# EAGLE board naswietlarka (EAGLE 6.5.0)
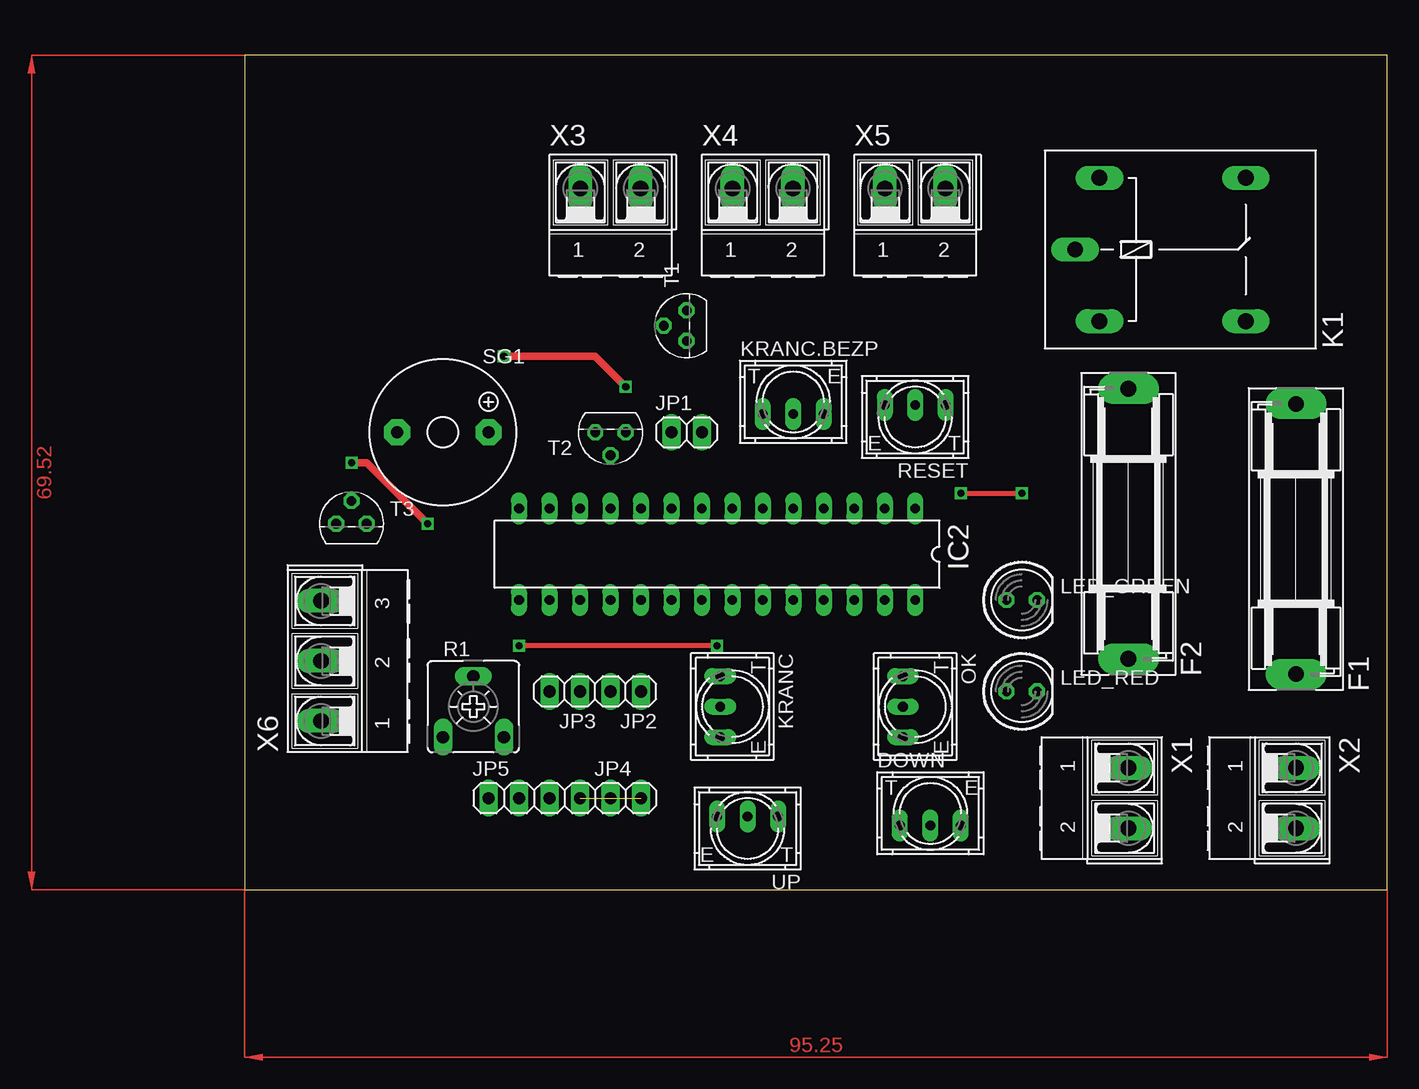
[diagram p0: board, top side]
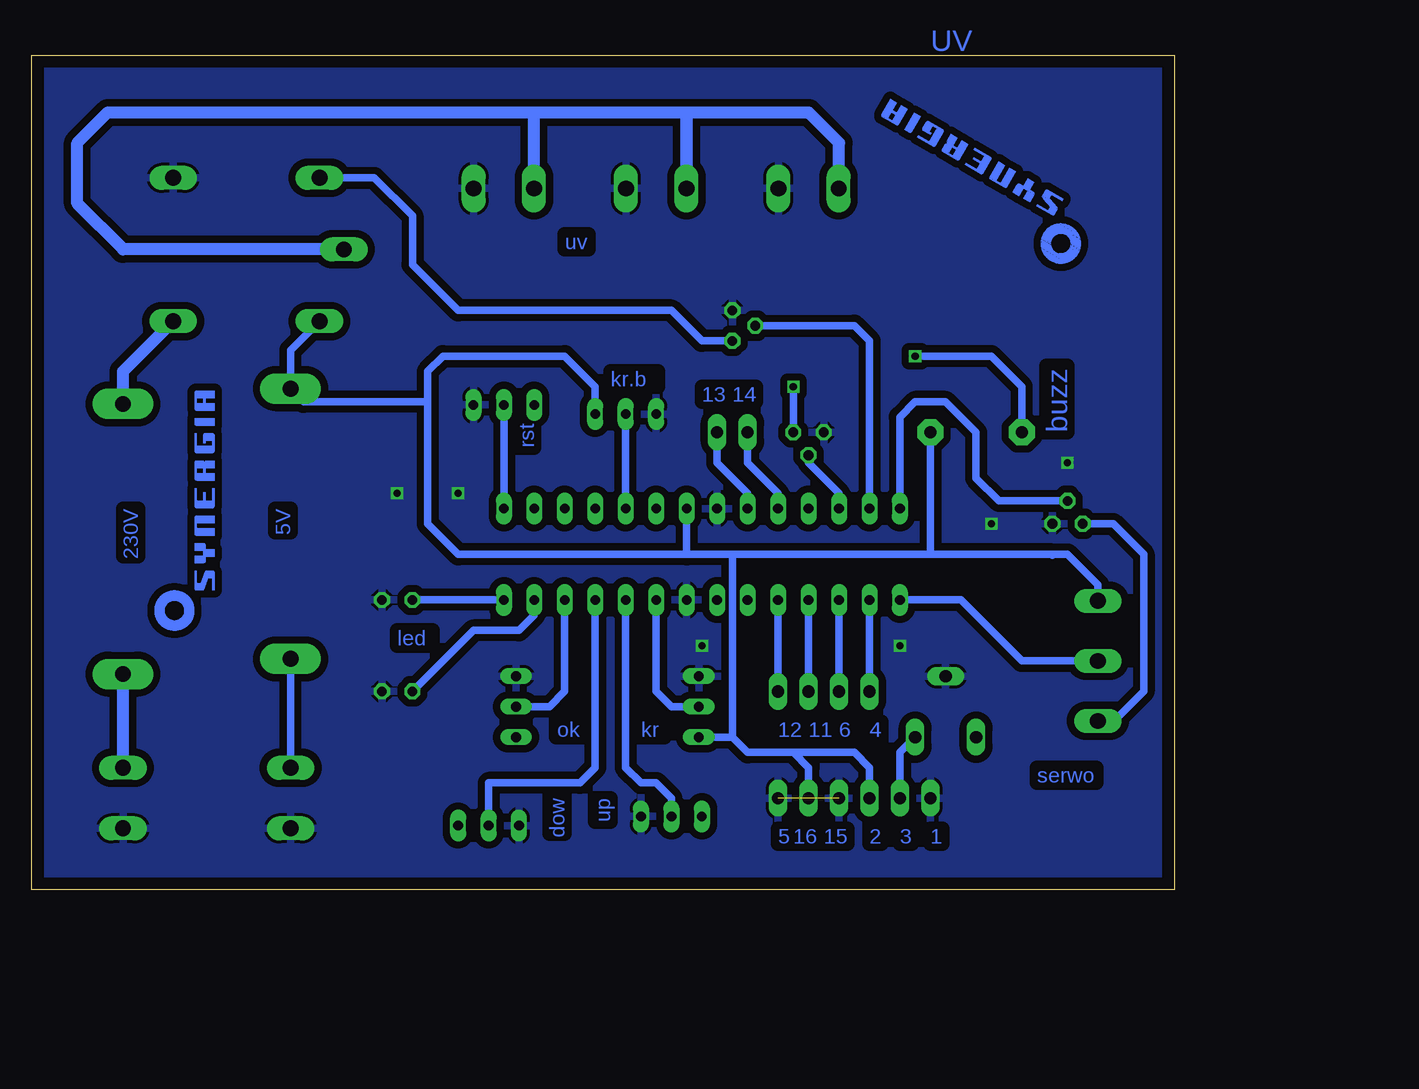
[diagram p1: board, bottom side, seen from below]

Size 95.23 x 69.52 mm. Coordinates in mm from the lower left corner, seen from the top.
Outline: 0,0 95.23,0 95.23,69.52 0,69.52 0,0
Copper layers (1*16): Top 0.035mm / dielectric 1.5mm / Bottom 0.035mm
Design rules "default": minimum track width 10mil, minimum drill 24mil, track to track 8mil, track to pad 8mil, pad to pad 8mil, via to via 8mil, smd to smd 8mil, copper to edge 40mil, drill to drill 8mil, minimum pad ring 10mil, minimum via ring 8mil, stop-mask expansion 4mil, vias tented up to drill 0mil, thermal gap 10mil

## Footprints (pad centres in the part's own frame; a part is rotated, then mirrored left to right if it is on the bottom)
TUXGR_16X2_R2 = drill 1 pad 1.676: 1 -32,15.5; 2 -29.46,15.5; 3 -26.92,15.5; 4 -24.38,15.5; 5 -21.84,15.5; 6 -19.3,15.5; 7 -16.76,15.5; 8 -14.22,15.5; 9 -11.68,15.5; 10 -9.14,15.5; 11 -6.6,15.5; 12 -4.06,15.5; 13 -1.52,15.5; 14 1.02,15.5; 15 3.56,15.5; 16 6.1,15.5 | hole 2.5: -37.5,-15.5; 37.5,-15.5; -37.5,15.5; 37.5,15.5
9077-1 = drill 0.813 long: 1 -2.54,-1.016; 2 0,-1.016; 3 2.54,-1.016
SH22,5 = drill 1.321 pad 2.54 long: 1 -11.252,0; 2 11.252,0
DIL28-3 = drill 0.813 long: 1 -16.51,-3.81; 2 -13.97,-3.81; 3 -11.43,-3.81; 4 -8.89,-3.81; 5 -6.35,-3.81; 6 -3.81,-3.81; 7 -1.27,-3.81; 8 1.27,-3.81; 9 3.81,-3.81; 10 6.35,-3.81; 11 8.89,-3.81; 12 11.43,-3.81; 13 13.97,-3.81; 14 16.51,-3.81; 15 16.51,3.81; 16 13.97,3.81; 17 11.43,3.81; 18 8.89,3.81; 19 6.35,3.81; 20 3.81,3.81; 21 1.27,3.81; 22 -1.27,3.81; 23 -3.81,3.81; 24 -6.35,3.81; 25 -8.89,3.81; 26 -11.43,3.81; 27 -13.97,3.81; 28 -16.51,3.81
1X02 = drill 1.016 long: 1 -1.27,0; 2 1.27,0
1X04 = drill 1.016 long: 1 -3.81,0; 2 -1.27,0; 3 1.27,0; 4 3.81,0
G5LE = drill 1.321 long: 1 -7.493,-5.969; 2 -7.493,5.969; O 4.699,5.969; P -9.525,0; S 4.699,-5.969
LED5MM = drill 0.813 octagon: A -1.27,0; K 1.27,0
CA6V = drill 1.016 long: A -2.54,-2.54; E 2.54,-2.54; S 0,2.54
F/TMB = drill 1.016 pad 2.159 octagon: + 3.81,0; - -3.81,0
TO92 = drill 0.813 octagon: 1 1.27,0; 2 0,1.905; 3 -1.27,0
AK500/2-H = drill 1.321 long: 1 -2.515,0; 2 2.515,0
AK500/3-H = drill 1.321 long: 1 -5.004,0; 2 0,0; 3 5.004,0

## Placement (x,y rotation side)
DIS1  TUXGR_16X2_R2  [TUXGR_16X2_R2]  40.64,-43.18 0 top  (outside the outline)
DOWN  9077-1  [9077-1]  57.15,6.35 0 top
F1  [SH22,5]  87.63,29.21 90 top
F2  [SH22,5]  73.66,30.48 90 top
IC2  MEGA8-P  [DIL28-3]  39.37,27.94 180 top
JP1  [1X02]  36.83,38.1 0 top
JP2  [1X02]  31.75,16.51 180 top
JP3  [1X02]  26.67,16.51 180 top
JP4  [1X02]  31.75,7.62 0 top
JP5  [1X04]  24.13,7.62 0 top
K1  G5L  [G5LE]  78.74,53.34 0 top
KRANC  9077-1  [9077-1]  40.64,15.24 270 top
KRANC.BEZP  9077-1  [9077-1]  45.72,40.64 0 top
LED_GREEN  [LED5MM]  64.77,24.13 0 top
LED_RED  [LED5MM]  64.77,16.51 0 top
OK  9077-1  [9077-1]  55.88,15.24 270 top
R1  [CA6V]  19.05,15.24 0 top
RESET  9077-1  [9077-1]  55.88,39.37 180 top
SG1  F/TMB  [F/TMB]  16.51,38.1 0 top
T1  BC547  [TO92]  36.83,46.99 90 top
T2  BC547  [TO92]  30.48,38.1 180 top
T3  BC547  [TO92]  8.89,30.48 0 top
U$1  [SYNERGIA_20MM]  80.01,21.59 90 bottom
U$2  [SYNERGIA_20MM]  6.35,55.88 150 bottom
UP  9077-1  [9077-1]  41.91,5.08 180 top
X1  [AK500/2-H]  73.66,7.62 270 top
X2  [AK500/2-H]  87.63,7.62 270 top
X3  [AK500/2-H]  30.48,58.42 0 top
X4  [AK500/2-H]  43.18,58.42 0 top
X5  [AK500/2-H]  55.88,58.42 0 top
X6  [AK500/3-H]  6.35,19.05 90 top

## Library data of the parts
DIS1 = display-lcd; OC_FARNELL: unknown; OC_NEWARK: unknown
DOWN KRANC KRANC.BEZP OK RESET UP = switch-misc
F1 F2 = fuse; MF: SCHURTER; MPN: 0031.8201; OC_FARNELL: 1162740; OC_NEWARK: 96F8317
IC2 = atmel; OC_FARNELL: unknown; OC_NEWARK: unknown
JP1-JP5 = pinhead
K1 = relay; OC_FARNELL: unknown; OC_NEWARK: unknown
LED_GREEN LED_RED = led
R1 = pot
SG1 = buzzer; OC_FARNELL: unknown; OC_NEWARK: unknown
T1-T3 = transistor
U$1 U$2 = synergia_logo
X1-X6 = con-ptr500; OC_FARNELL: unknown; OC_NEWARK: unknown

## Nets
+5V: F2.2 IC2.7 JP4.1 JP5.3 K1.1 KRANC.3 KRANC.BEZP.3 SG1.+ X6.3
AVCC: IC2.20
BUZZER: IC2.12 T2.2
DOWN: DOWN.2 IC2.25
EN_PWM: IC2.14 T3.2
GND: DOWN.1 IC2.8 IC2.22 JP4.2 JP5.1 JP5.4 K1.O KRANC.1 KRANC.BEZP.1 LED_GREEN.K LED_RED.K OK.1 R1.S RESET.1 T1.1 T2.1 T3.1 UP.1 X1.2 X2.2 X3.2 X4.2 X5.2
KRANC: IC2.23 KRANC.2
KRANC.BEZP: IC2.5 KRANC.BEZP.2
LED_GREEN: IC2.28 LED_GREEN.A
LED_RED: IC2.27 LED_RED.A
N$1: JP5.2 R1.E
N$2: K1.2 T1.3
N$3: F1.1 X2.1
N$4: SG1.- T2.3
N$5: F2.1 X1.1
N$6: DIS1.1
N$7: DIS1.2
N$9: T3.3 X6.1
OK: IC2.26 OK.2
PB2: IC2.16 JP3.2
PB3: IC2.17 JP3.1
PB4: IC2.18 JP2.2
PB5: IC2.19 JP2.1
PB6: IC2.9 JP1.2
PB7: IC2.10 JP1.1
PWM: IC2.15 X6.2
RELAY: IC2.13 T1.2
RESET: IC2.1 RESET.2
UP: IC2.24 UP.2
UV: K1.P X3.1 X4.1 X5.1
VCC: F1.2 K1.S

## Tracks (layer width: path | path; a pad name or v marks a point on that pad's centre or on a via)
+5V
  Bottom 0.61: IC2.7 40.64,27.94 | 40.64,27.94 59.69,27.94 62.23,30.48 62.23,40.64 | 10.16,27.94 10.16,27.86 | 10.16,27.94 20.32,27.94 | 20.32,27.94 36.83,27.94 | 36.83,27.94 40.64,27.94 | JP5.3 25.4,10.16 26.67,11.43 31.75,11.43 | 31.75,11.43 35.56,11.43 36.83,12.7 | JP4.1 30.48,10.16 31.75,11.43 | K1.1 73.66,44.96 F2.2 72.57,40.64 62.23,40.64 | 62.23,40.64 62.23,43.18 60.96,44.45 50.8,44.45 48.26,41.91 KRANC.BEZP.3 | KRANC.3 36.83,12.7 | 36.83,12.7 36.83,27.94 | 10.16,27.94 8.89,27.94 6.35,25.4 X6.3 | SG1.+ 20.32,27.94
BUZZER
  Bottom 0.61: T2.2 30.48,35.56 27.94,33.02 IC2.12
DOWN
  Bottom 0.61: IC2.25 48.26,10.16 49.53,8.89 57.15,8.89 DOWN.2
EN_PWM
  Bottom 0.61: T3.2 14.61,32.39 16.51,34.29 16.51,38.1 19.05,40.64 21.59,40.64 22.86,39.37 IC2.14
GND  (via drill 0.6)  (1 unrouted)
  Top 0.406: v39.37,20.32 v22.86,20.32 | v59.69,33.02 v64.77,33.02
  Top 0.61: v8.89,35.56 10.16,35.56 v15.24,30.48
  pour Bottom (isolate 0.61): -8.89,74.93 101.6,76.2 101.6,-3.81 -7.62,-5.08
KRANC
  Bottom 0.61: IC2.23 43.18,16.51 41.91,15.24 KRANC.2
KRANC.BEZP
  Bottom 0.61: IC2.5 KRANC.BEZP.2
LED_GREEN
  Bottom 0.61: IC2.28 LED_GREEN.A
LED_RED
  Bottom 0.61: IC2.27 53.34,22.86 54.61,21.59 58.42,21.59 LED_RED.A
N$1
  Bottom 0.61: R1.E 22.86,11.43 JP5.2
N$2
  Bottom 0.61: K1.2 66.67,59.31 63.5,56.13 63.5,52.07 59.69,48.26 41.91,48.26 39.37,45.72 T1.3
N$3
  Bottom 1.016: X2.1 F1.1
N$4  (via drill 0.6)
  Top 0.61: v31.75,41.91 29.21,44.45 v21.59,44.45
  Bottom 0.61: T2.3 v31.75,41.91 | SG1.- 12.7,41.91 15.24,44.45 v21.59,44.45
N$5
  Bottom 0.61: X1.1 F2.1
N$9
  Bottom 0.61: T3.3 5.08,30.48 2.54,27.94 2.54,16.51 5.08,13.97 6.27,13.97 X6.1
OK
  Bottom 0.61: IC2.26 50.8,16.51 52.07,15.24 OK.2
PB2
  Bottom 0.61: IC2.16 JP3.2
PB3
  Bottom 0.61: IC2.17 JP3.1
PB4
  Bottom 0.61: IC2.18 JP2.2
PB5
  Bottom 0.61: IC2.19 JP2.1
PB6
  Bottom 0.61: JP1.2 38.1,35.56 35.56,33.02 IC2.9
PB7
  Bottom 0.61: JP1.1 35.56,35.56 33.02,33.02 IC2.10
PWM
  Bottom 0.61: IC2.15 17.78,24.13 12.7,19.05 X6.2
RELAY
  Bottom 0.61: IC2.13 25.4,45.72 26.67,46.99 T1.2
RESET
  Bottom 0.61: RESET.2 IC2.1
UP
  Bottom 0.61: IC2.24 45.72,10.16 44.45,8.89 43.18,8.89 41.91,7.62 UP.2
UV
  Bottom 1.016: K1.P 87.63,53.34 91.44,57.15 91.44,62.23 88.9,64.77 53.34,64.77 | X4.1 40.66,64.75 40.64,64.72 | 53.37,64.75 X5.1 53.34,58.45 53.34,64.77 | 53.34,64.77 30.48,64.77 | 30.48,64.77 27.94,62.23 27.96,62.2 X3.1 | 40.64,64.72 40.64,58.42 | 30.48,64.77 30.53,64.72 40.64,64.72
VCC
  Bottom 1.016: F1.2 87.63,43.18 K1.S
(copper drawn outside any net)
  shapes: Top area x2

## Text on the board
Bottom: UV | uv | kr.b | 14 | 13 | buzz | rst | 5V | 230V | led | ok | 4 | 6 | 11 | 12 | kr | serwo | up | dow | 1 | 3 | 2 | 15 | 16 | 5